# Altium PCB SSDR.PcbDoc
Units mm, origin at the board's own origin, x right, y up, seen from the top; angles counter-clockwise.
Board outline 90.25 x 65.25 mm, 2 copper layers (Top Layer, Bottom Layer); 26 components, 25 nets, 97 pads, 4 vias.
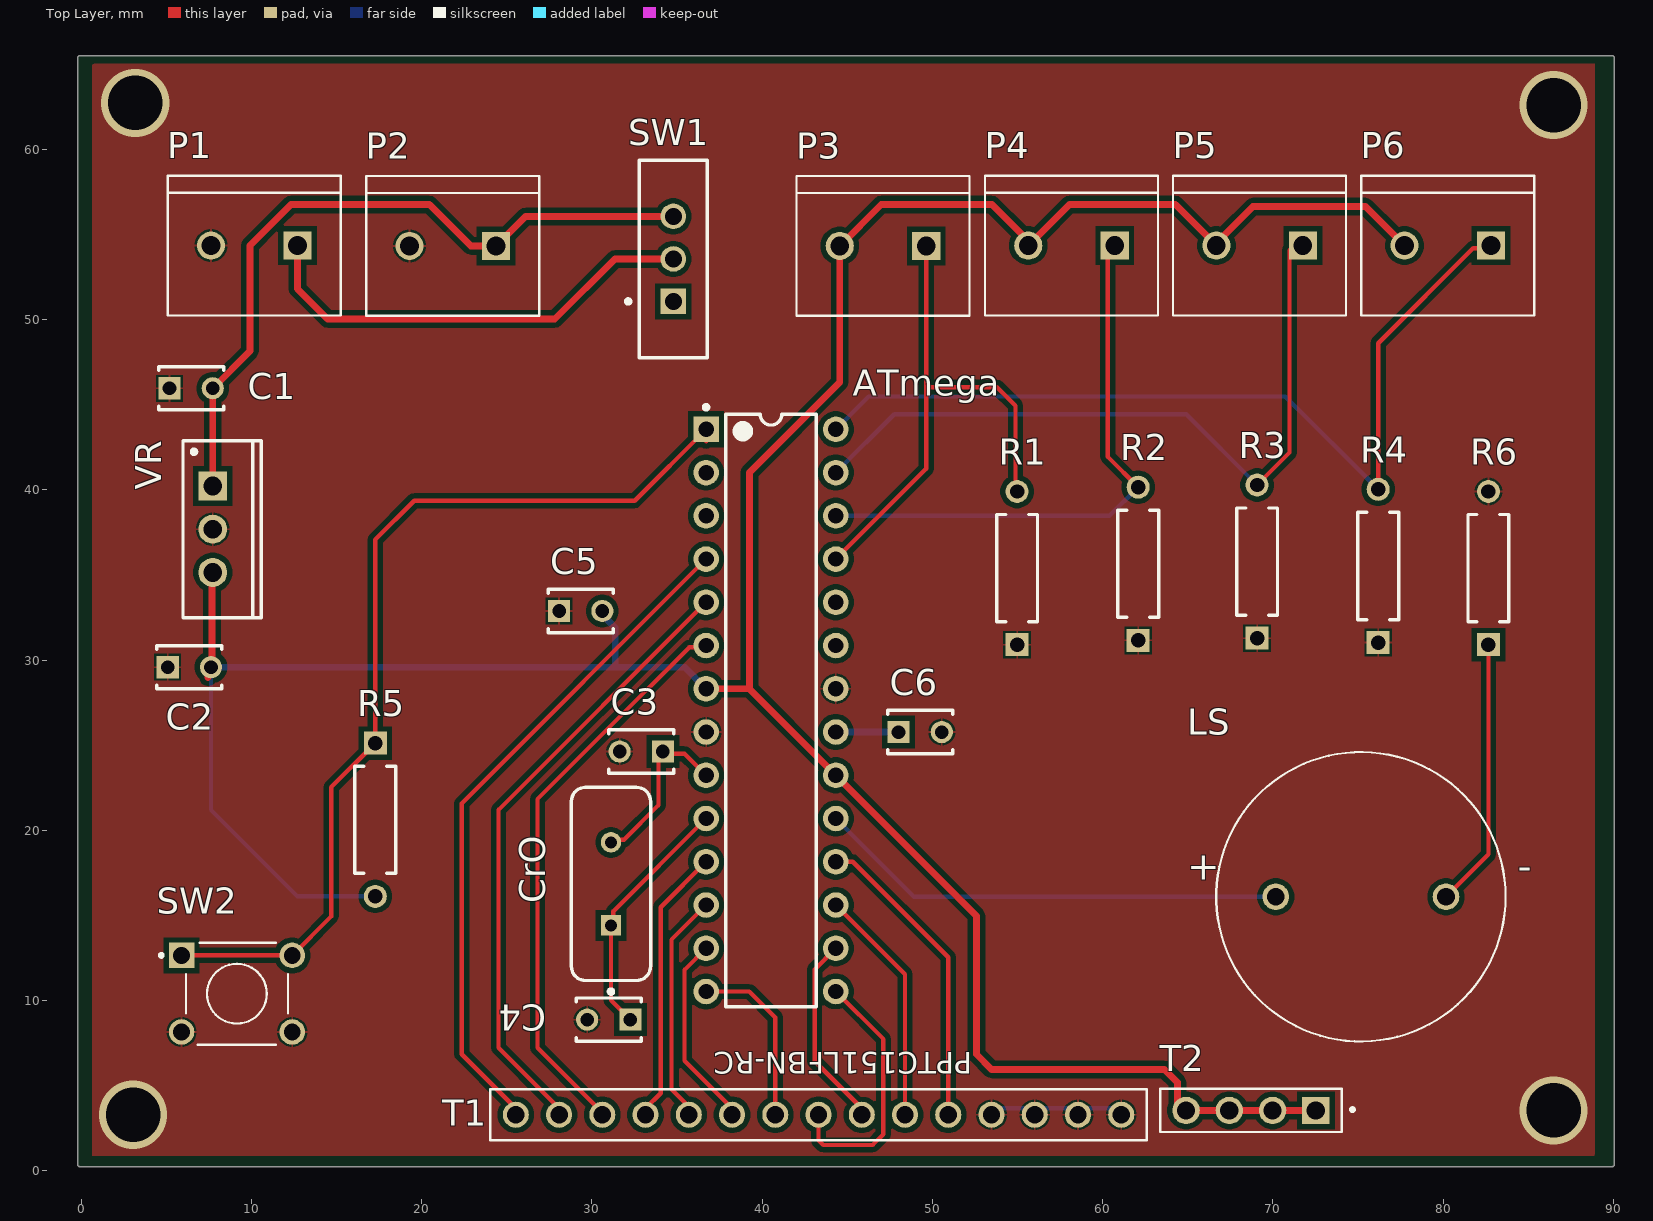
[diagram p0: Top Layer view]
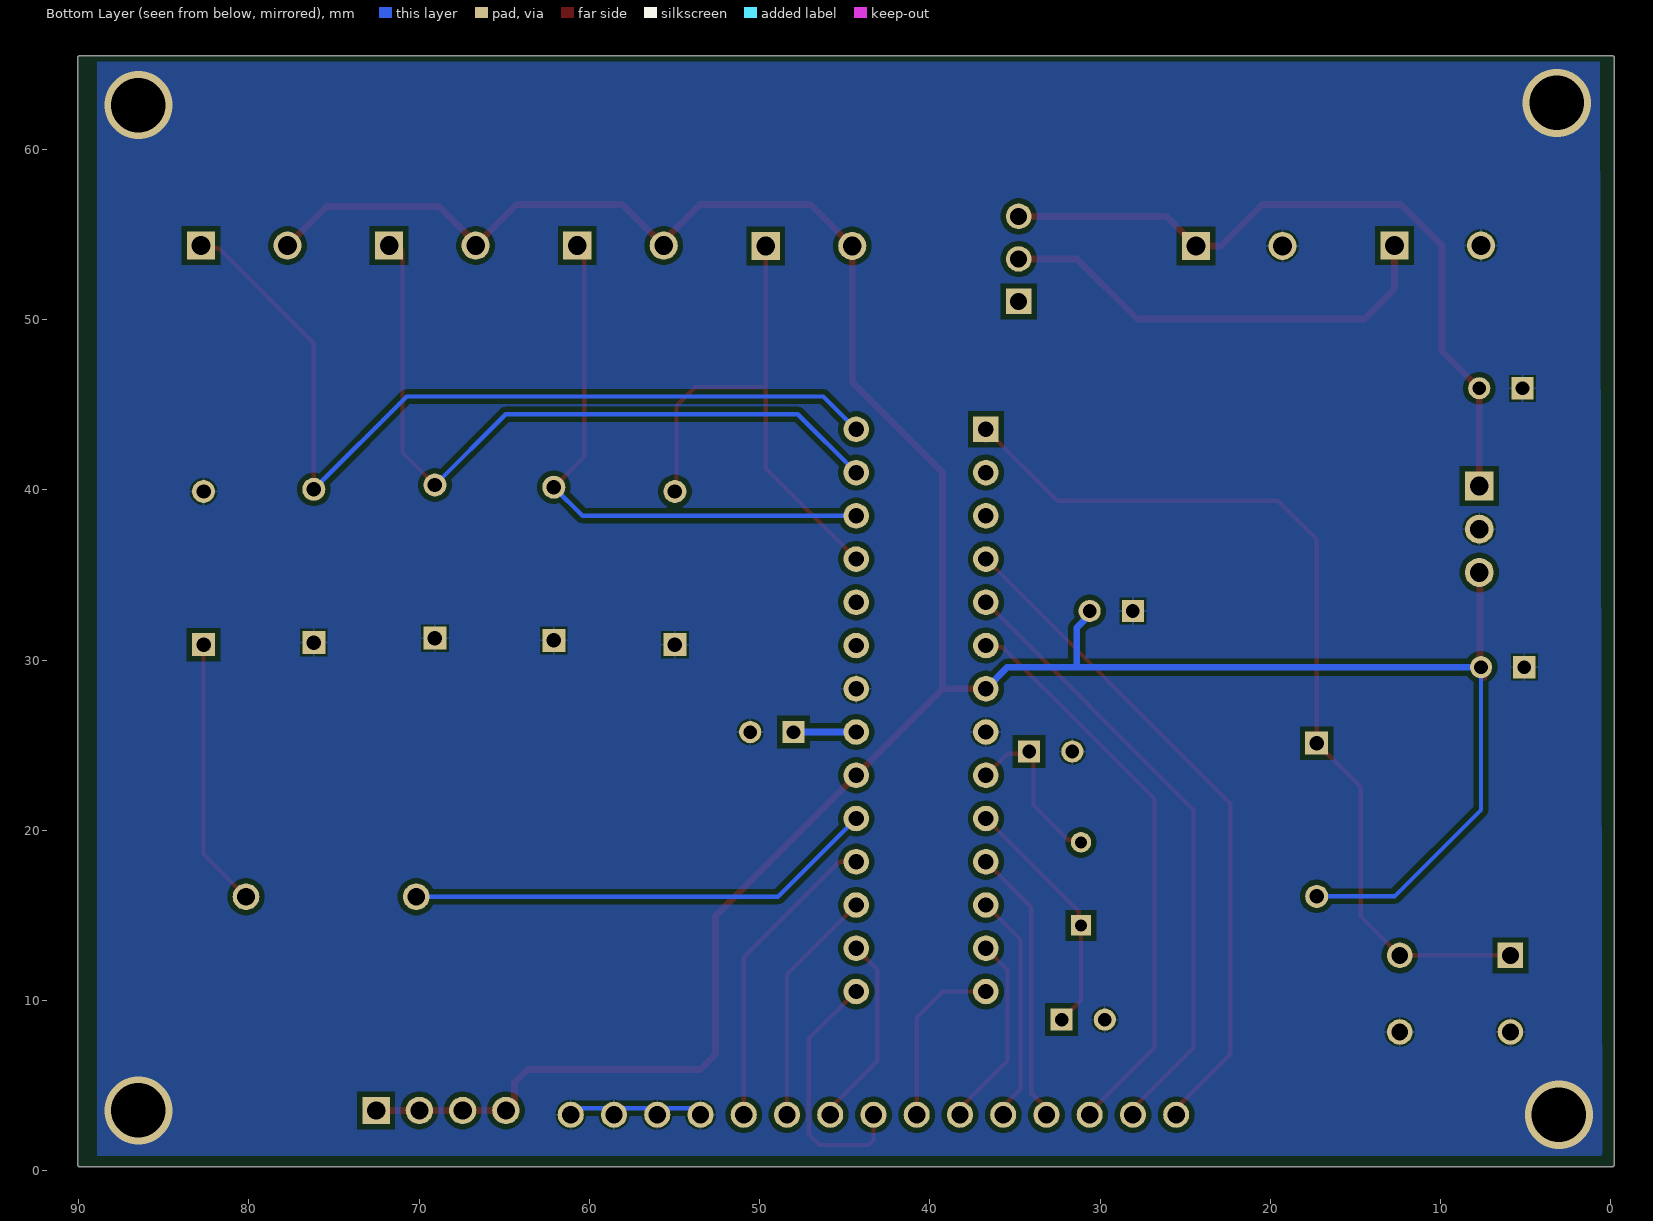
[diagram p1: Bottom Layer view, seen from below]

## Layer stack, top to bottom
Top Solder: solder mask 0.0102, Solder Resist, Dk 3.5
Top Layer: signal copper 0.0356
Dielectric 1: dielectric 0.32, FR-4, Dk 4.8
Bottom Layer: signal copper 0.0356
Bottom Solder: solder mask 0.0102, Solder Resist, Dk 3.5

## Board outline
-0.079,0.254 cw(c-0.08,0.381) -0.207,0.381 -0.207,65.381 cw(c-0.08,65.381) -0.08,65.508 89.92,65.508 cw(c89.92,65.381) 90.047,65.381 90.047,0.381 cw(c89.92,0.381) 89.92,0.254

## Design rules (kind name [scope] priority, off if disabled: settings)
BoardOutlineClearance [All] p1: gap=0.2 ignorepadtopadclearanceinfootprint=FALSE
Clearance [All] p1: gap=0.3 ignorepadtopadclearanceinfootprint=FALSE
ComponentClearance [All] p1: gap=0.127 collisioncheckmode=3 verticalgap=0.127 showdistances=TRUE
DiffPairsRouting [All] p1: maxlimit=0.254 minlimit=0.127 mostfreqgap=0.127 toplayer_minwidth=0.127 toplayer_maxwidth=25.4 toplayer_prefwidth=0.127 bottomlayer_minwidth=0.127 bottomlayer_maxwidth=25.4 bottomlayer_prefwidth=0.127 maxuncoupledlength=12.7
Height [All] p1: minheight=0 maxheight=1816.048 prefheight=12.7
HoleSize [All] p1: absolutevalues=TRUE maxlimit=6.3 minlimit=0.3 maxpercent=80.000 minpercent=20.000
HoleToHoleClearance [All] p1: gap=0.3 allowstackedmicrovias=FALSE
MinimumAnnularRing [All] p1: minimumring=0.076
MinimumSolderMaskSliver [All] p1: minsoldermaskwidth=0
PlaneClearance [All] p1: clearance=0.127
PlaneConnect PlaneConnectPowerPads [InPadClass('PowerPads')] p1: planeconnectstyle=Direct reliefexpansion=0.508 reliefentries=4 reliefconductorwidth=0.254 reliefairgap=0.254
PlaneConnect [All] p2: pad.planeconnectstyle=Relief pad.reliefexpansion=0.3 pad.reliefentries=4 pad.reliefconductorwidth=0.127 pad.reliefairgap=0.127 via.planeconnectstyle=Direct via.reliefexpansion=0.3 via.reliefentries=4 via.reliefconductorwidth=0.127 via.reliefairgap=0.127
PolygonConnect PolygonConnectPowerPads [All vs (InPadClass('PowerPads'))] p1: connectstyle=Direct reliefconductorwidth=0.254 reliefentries=4 polygonreliefangle="90 Angle" airgapwidth=0.254
PolygonConnect [All] p2: thpad.connectstyle=Relief thpad.reliefconductorwidth=0.127 thpad.reliefentries=4 thpad.polygonreliefangle="90 Angle" thpad.airgapwidth=0.127 smdpad.connectstyle=Relief smdpad.reliefconductorwidth=0.127 smdpad.reliefentries=4 smdpad.polygonreliefangle="90 Angle" smdpad.airgapwidth=0.127 via.connectstyle=Direct via.reliefconductorwidth=0.127 via.reliefentries=4 via.polygonreliefangle="90 Angle" via.airgapwidth=0.127
RoutingVias [All] p1: holewidth=0.3 width=0.6 viastyle="Through Hole" minholewidth=0.3 minwidth=0.6 maxholewidth=0.6 maxwidth=6.6
SilkToSilkClearance [All] p1: silktosilkclearance=0
SilkToSolderMaskClearance [IsPad] p1: minsilkscreentomaskgap=0.127 clearancetoexposedcopper=TRUE
SolderMaskExpansion [All] p1: expansion=0.075 istentingtop=FALSE
Width [All] p1: maxlimit=25.4 minlimit=0.127 preferedwidth=0.127 minimp=50.000000 maximp=50.000000 favimp=50.000000
20 further rules are at their usual default settings.

## Components (designator, comment, footprint, x,y, rotation, side; value= is the part's Value field where it differs from the comment)
ATmega "ATMEGA328P-PU" ATML-28P3 40.513,27.051 r0 top
C1 "330nF" KEMT-C315-THT-2 6.455,45.974 r0 top
C2 "100nF" KEMT-C315-THT-2 6.35,29.591 r0 top
C3 "22pF" KEMT-C315-THT-2 32.893,24.638 r180 top
C4 "22pF" KEMT-C315-THT-2 30.988,8.89 r180 top
C5 "10uF" KEMT-C315-THT-2 29.337,32.893 r0 top
C6 "0.1uF" KEMT-C315-THT-2 49.276,25.781 r0 top
CrO "FOXSLF/160-20" FOX-FOXSLF160-20 31.115,16.864 r90 top
LS "PKM17EPP-2002-B0" SPKR_PKM17EPP-2002-B0 75.162,16.107 r0 top
P1 "282837-2" TE_282837-2 10.16,54.356 r180 top
P2 "282837-2" TE_282837-2 21.822,54.334 r180 top
P3 "282837-2" TE_282837-2 47.095,54.334 r180 top
P4 "282837-2" TE_282837-2 58.166,54.356 r180 top
P5 "282837-2" TE_282837-2 69.215,54.356 r180 top
P6 "282837-2" TE_282837-2 80.264,54.356 r180 top
R1 "CFR-25JB-52-470K" RESA60-630X240 54.969,35.411 r90 top value=330
R2 "CFR-25JB-52-470K" RESA60-630X240 62.081,35.665 r90 top value=330
R3 "CFR-25JB-52-470K" RESA60-630X240 69.066,35.792 r90 top value=330
R4 "CFR-25JB-52-470K" RESA60-630X240 76.178,35.538 r90 top value=330
R5 "CFR-25JB-52-470K" RESA60-630X240 17.272,20.629 r270 top value=10k
R6 "CFR-25JB-52-470K" RESA60-630X240 82.655,35.411 r90 top value=100
SW1 "EG1218" ESWI-EG1218_V 34.776,53.572 r90 top
SW2 "1825910-6" SW_1825910-6-4 9.144,10.414 r0 top
T1 "PPTC151LFBN-RC" PPTC151LFBN-RC 61.087,3.302 r180 top
T2 "PPTC041LFBN-RC" SULLINS_PPTC041LFBN-RC 68.707,3.556 r180 top
VR "L7805CV" TO220 7.725,37.697 r270 top

## Footprints (in the part's own frame and the unit in brackets; to place one, negate y for a bottom-side part, rotate by r counter-clockwise, add the part's x,y. Pads: shape width x height; smd on the part's side, far side on the other; paste and mask are expansions set on the pad)
ATML-28P3 [mm] "DIP, 28-Leads, Body 34.8x7.2mm, Pitch 2.54mm"
  rect 1.5x1.5 hole 0.9: 1(-3.81,16.51)
  round 1.5 hole 0.9: 2(-3.81,13.97) 3(-3.81,11.43) 4(-3.81,8.89) 5(-3.81,6.35) 6(-3.81,3.81) 7(-3.81,1.27) 8(-3.81,-1.27) 9(-3.81,-3.81) 10(-3.81,-6.35) 11(-3.81,-8.89) 12(-3.81,-11.43) 13(-3.81,-13.97) 14(-3.81,-16.51) 15(3.81,-16.51) 16(3.81,-13.97) 17(3.81,-11.43) 18(3.81,-8.89) 19(3.81,-6.35) 20(3.81,-3.81) 21(3.81,-1.27) 22(3.81,1.27) 23(3.81,3.81) 24(3.81,6.35) 25(3.81,8.89) 26(3.81,11.43) 27(3.81,13.97) 28(3.81,16.51)
  silkscreen extent -3.93,-17.4 2.65,17.93, body extent -3.95,-17.4 3.95,17.4, height 4.58
ESWI-EG1218_V [mm] "THD, 3-Leads, Body 11.6x4mm, Pitch 2.5mm"
  rect 1.5x1.5 hole 1: 1(-2.5,0)
  round 1.5 hole 1: 2(0,0) 3(2.5,0)
  silkscreen extent -5.8,-2 5.8,2.77, body extent -5.8,-2 5.8,2, height 7.4
FOX-FOXSLF160-20 [mm] "THD, 2-Leads, Body 11.35x4.65mm"
  rect 1.2x1.2 hole 0.7: 1(-2.44,0)
  round 1.2 hole 0.7: 2(2.44,0)
  silkscreen extent -6.45,-2.33 5.68,2.33, body extent -5.67,-2.32 5.68,2.33, height 3.6
KEMT-C315-THT-2 [mm] "THD, 2-Leads, Body 3.81x2.54mm"
  rect 1.3x1.3 hole 0.8: 1(-1.27,0)
  round 1.3 hole 0.8: 2(1.27,0)
  silkscreen extent -1.91,-1.27 1.91,1.27, body extent -1.91,-1.27 1.91,1.27, height 4.66
PPTC151LFBN-RC [mm]
  round 1.53 hole 1.02: P$1(0,0) P$2(2.54,0) P$3(5.08,0) P$4(7.62,0) P$5(10.16,0) P$6(12.7,0) P$7(15.24,0) P$8(17.78,0) P$9(20.32,0) P$10(22.86,0) P$11(25.4,0) P$12(27.94,0) P$13(30.48,0) P$14(33.02,0) P$15(35.56,0)
  silkscreen extent -1.5,-1.5 37.06,1.5
RESA60-630X240 [mm] "Axial Resistor, 2-Leads, Dia 2.4mm, Body Length 6.3mm"
  rect 1.35x1.35 hole 0.85: 1(-4.5,0)
  round 1.35 hole 0.85: 2(4.5,0)
  silkscreen extent -3.15,-1.2 3.15,1.2, body extent -4.77,-1.19 4.77,1.2, height 2.4
SPKR_PKM17EPP-2002-B0 [mm]
  round 1.56 hole 1.04: N(5,0) P(-5,0)
  silkscreen extent -8.5,-8.5 8.5,8.5
SULLINS_PPTC041LFBN-RC [mm]
  rect 1.605x1.605 / inner round 1.605 / far side rect 1.605x1.605 hole 1.07: 1(-3.81,0)
  round 1.605 hole 1.07: 2(-1.27,0) 3(1.27,0) 4(3.81,0)
  silkscreen extent -6.06,-1.27 5.33,1.27, body extent -5.33,-1.27 5.33,1.27, height 8.51
SW_1825910-6-4 [mm]
  rect 1.498x1.498 / inner round 1.498 / far side rect 1.498x1.498 hole 0.99: 1(-3.25,2.25)
  round 1.498 hole 0.99: 2(3.25,2.25) 3(-3.25,-2.25) 4(3.25,-2.25)
  silkscreen extent -4.54,-2.99 3,2.99, body extent -3,-3.9 3,3.9, height 5.01
TE_282837-2 [mm]
  rect 1.65x1.65 / inner round 1.65 / far side rect 1.65x1.65 hole 1.1: 1(-2.54,0)
  round 1.65 hole 1.1: 2(2.54,0)
  silkscreen extent -5.08,-4.1 5.08,4.1, body extent -5.68,-4.1 5.08,4.1, height 10
TO220 [mm] "TO, Thru-Hole, Vertical, Heatsink Mounted; 3 In-Line Leads; Pitch 2.54 mm"
  rect 1.7x1.7 hole 1.1: 1(-2.54,0)
  round 1.7 hole 1.1: 2(0,0) 3(2.54,0)
  silkscreen extent -5.2,-1.75 5.2,2.85, body extent -5.25,-1.8 5.25,2.9, height 19.7

## Part data
ATmega: library part CMP-020-00004-3, "8-Bit Microcontroller with 32 KBytes In-System Programmable Flash, 23 I/Os, -40 to 85 degC, 28-Pin PDIP (28P3), RoHS, Tube", Case/Package=DIP, Manufacturer=Atmel, Max Clock Frequency=20MHz, Max Operating Temperature=85°C, Max Supply Voltage=5.5V, Min Operating Temperature=-40°C, Min Supply Voltage=1.8V, Package Description="28-Pin Plastic Dual Inline Package, Body 34.671 x 7.3025 mm, Pitch 2.54 mm", Package Quantity=14, Package Reference=28P3, Package Version="Rev. B, 09/2001", Datasheet URL=http://www.atmel.com/images/Atmel-8271-8-bit-AVR-Microcontroller-ATmega48A-48PA-88A-88PA-168A-168PA-328-328P_datasheet_Complete.pdf, Datasheet Version="Rev. 8271J, 11/2015", Density=32KB, Ethernet Channels=0, I/Os=23, Interface=USART, Manufacturer URL=http://www.atmel.com/, Mounting Technology=TH, Package URL=http://www.atmel.com/images/Atmel-8271-8-bit-AVR-Microcontroller-ATmega48A-48PA-88A-88PA-168A-168PA-328-328P_datasheet_Complete.pdf, Packaging=Rail/Tube, Pins=28, RAM Size=2KB, RoHS Compliant=True
C1 C2 C3 C4 C5 C6: library part CMP-1664-00008-1, "Capacitor, Ceramic, 22 pF, +/-10 %, 100 V, -55 to 125 degC, 2-Pin THD, RoHS, Bulk", Case\Package=TO-220, Max Input Voltage="40 V", Max Operating Temperature="125 degC", Max Ouput Current="1.5 A", Min Input Voltage="4.2 V", Min Operating Temperature="0 degC", Output Voltage="1.2 V", Package Quantity=50, ComponentLink1Description="Manufacturer URL", ComponentLink1URL=http://www.kemet.com/, ComponentLink2Description=Datasheet, ComponentLink2URL=http://capacitoredge.kemet.com/capedge2/DataSheet/Datasheet-C315C220K1G5TA.pdf?pn=C315C220K1G5TA{BULK}, DatasheetVersion=Aug-16, Height="9.28 mm", Length="10.28 mm", Mount="Through Hole", Output Current="1.5 A", Outputs=1, PackageDescription="2-Pin Through Hole Device, Body 3.81 x 2.54 mm", PackageReference=C315-THT-2, Packaging=Rail/Tube, Pins=3, Radiation Hardening=No, REACH SVHC="No SVHC", RoHSCompliant=true, Weight="0.08113 oz", Width="4.82 mm"
CrO: library part CMP-1749-00003-1, "Resistance Weld Thru-Hole Crystal, 16 MHz, -20 to 70 degC, 2-Pin THD, RoHS, Bulk", Case\Package=Axial, Max Operating Temperature="155 degC", Min Operating Temperature="-55 degC", Package Quantity=200, Power Rating="250 mW", Resistance="221 kohm", Tolerance=1%, Voltage Rating="250 V", ComponentLink1Description="Manufacturer URL", ComponentLink1URL=http://www.foxonline.com/, ComponentLink2Description=Datasheet, ComponentLink2URL=http://www.foxonline.com/pdfs/hc49slf.pdf, DatasheetVersion=Mar-15, Length="0.248 inch", Mount="Through Hole", PackageDescription="2-Pin Through Hole Device, Body 11.35 x 4.65 mm", PackageReference=FOXSLF160-20, Packaging=Bulk, RoHSCompliant=true
LS: library part CMP-017-000001-1, "Buzzers Transducer, Externally Driven Piezo 3V 2kHz 70dB @ 3V, 10cm Through Hole PC Pins", Package=None, Availability=Unavailable, Component Type=Standard, Design Item ID=PKM17EPP-2002-B0, MP=PKM17EPP-2002-B0, Pin Count=2, Price=None, Source=PKM17EPP-2002-B0.SchLib
P1 P2 P3 P4 P5 P6: library part CMP-019-000000-1, "Разъемные клеммные колодки Розетка 2 положения 5,08 мм Припой прямой через отверстие 13,5 А / контакт", Package=None, Availability="In Stock", Check_prices=https://www.snapeda.com/parts/282837-2/TE+Connectivity+AMP+Connectors/view-part/?ref=eda, Component Type=Standard, Design Item ID=282837-2, MF="TE Connectivity", MP=282837-2, Pin Count=2, Price=None, Purchase-URL=https://pricing.snapeda.com/search/part/282837-2/?ref=eda, SnapEDA_Link=https://www.snapeda.com/parts/282837-2/TE+Connectivity+AMP+Connectors/view-part/?ref=snap, Source=282837-2.SchLib
R1 R2 R3 R4 R5 R6: library part CMP-009-00055-4, "RES 470K OHM 5% 1/4W AXIAL", Case/Package=Axial, Manufacturer=Yageo, Max Operating Temperature=155°C, Min Operating Temperature=-55°C, Package Description="2-Pin Axial Lead, Dia 2.4 mm, Body Length 6.3 mm", Package Quantity=200, Package Reference=MFR-25, Power=250mW, Tolerance=1%, Voltage Rating=250V, Datasheet URL=http://www.yageo.com/documents/recent/Yageo%20LR_MFR_2013.pdf, Datasheet Version=Apr-13, Manufacturer URL=http://www.yageo.com/, Mounting Technology=TH, Packaging=Bulk, RoHS Compliant=True
SW1: library part CMP-011-00006-2, "Slide Switch, SPDT, 500 V, -20 to 70 degC, 3-Pin THD, RoHS, Bulk", Contact Current Rating=200mA, Manufacturer=E-Switch, Max Operating Temperature=70°C, Min Operating Temperature=-20°C, Operating Force=250gf, Package Description="3-Pin Through Hole Device, Body 11.6 x 4 mm, Pitch 2.5 mm", Package Quantity=1000, Voltage Rating (AC)=30V, Case/Package=EG1218, Contact Finish=Silver, Contact Material=Copper, Contact Plating=Silver, Current Rating=200mA, Datasheet URL=https://www.e-switch.com/system/asset/product_line/data_sheet/119/EG.pdf, Datasheet Version=Oct-15, Manufacturer URL=http://www.e-switch.ch/en/, Mounting Technology=TH, Package Reference=EG1218, Packaging=Bulk, Pins=3, RoHS Compliant=True, Throw Configuration=SPDT, Voltage Rating (DC)=30V
SW2: library part CMP-011-00014-1, "Switch Push Button OFF (ON) SPST Round Button 0.05A 24VDC Momentary Contact PC Pins Thru-Hole", Case/Package=None, Check_prices=https://www.snapeda.com/parts/1825910-6/TE+Connectivity+ALCOSWITCH+Switches/view-part/?ref=eda, Component Type=Standard, Design Item ID=1825910-6, Digi-Key_Part_Number=450-1650-ND, MF="TE Connectivity", MP=1825910-6, Pins=4, Purchase-URL=https://pricing.snapeda.com/search/part/1825910-6/?ref=eda, SnapEDA_Link=https://www.snapeda.com/parts/1825910-6/TE+Connectivity+ALCOSWITCH+Switches/view-part/?ref=snap, Source=1825910-6.SchLib
T1: library part CMP-002-00072-1, "15 Position Header Connector Through Hole", Case/Package=None, Availability=Unavailable, Component Type=Standard, Design Item ID=PPTC151LFBN-RC, MF="Sullins Connector", MP=PPTC151LFBN-RC, Pins=15, Price=None, SnapEDA_Link=https://www.snapeda.com/parts/PPTC151LFBN-RC/Sullins%20Connector%20Solutions/view-part/592000/?ref=snap, Source=SnapEDAsch.SchLib
T2: library part CMP-002-00073-1, "4 Position Header Connector 0.100 (2.54mm) Through Hole Tin", Case/Package=None, Check_prices=https://www.snapeda.com/parts/PPTC041LFBN-RC/Sullins+Connector+Solutions/view-part/?ref=eda, Component Type=Standard, Design Item ID=PPTC041LFBN-RC, Digi-Key_Part_Number=S7002-ND, MF="Sullins Connector", MP=PPTC041LFBN-RC, Pins=4, Purchase-URL=https://pricing.snapeda.com/search/part/PPTC041LFBN-RC/?ref=eda, SnapEDA_Link=https://www.snapeda.com/parts/PPTC041LFBN-RC/Sullins+Connector+Solutions/view-part/?ref=snap, Source=PPTC041LFBN-RC.SchLib
VR: library part CMP-019-00018-3, Case/Package=TO-220, Dropout Voltage=2V, Manufacturer=STMicroelectronics, Max Input Voltage=35V, Max Operating Temperature=125°C, Max Ouput Current=1.5A, Max Supply Voltage=20V, Min Input Voltage=7V, Min Operating Temperature=0°C, Min Supply Voltage=8V, Nominal Output Voltage=5V, Package Quantity=50, Datasheet URL=https://datasheet.ciiva.com/15111/getdatasheetpartid-44136-15111027.pdf, Datasheet Version="Rev 30, 09/2012", Manufacturer URL=http://www.st.com/, Mounting Technology=TH, Output Current=1.5A, Output Voltage=5V, Outputs=1, Packaging=Rail/Tube, Pins=3, RoHS Compliant=True

## Via types
v1: diameter 4, hole 3.2, Top Layer to Bottom Layer, 4 vias

## Nets (pads, with @x,y where several pads share a name; then routed paths per layer and width w, separated by ;. In a path a pad name is that pad's centre, name@x,y a point inside that pad or via, vN(x,y) a via of type N, cw(c..) or ccw(c..) an arc to the next point about the centre after c; other vN are vias at no path point)
GND: ATmega.8 ATmega.22 C1.1 C2.1 C3.2 C4.2 C5.1 C6.2 P1.2 P2.2 R1.1 R2.1 R3.1 R4.1 R6.2 SW2.3 SW2.4 T1.P$1 T1.P$2 T1.P$3 T1.P$4 VR.2 | length 10.2
  Bottom Layer w0.254: T1.P$3@56.007,3.683 53.467,3.683 58.547,3.683 T1.P$1@61.087,3.683
  other v1: 3.048,3.302 86.487,3.556 86.487,62.611 3.175,62.738
NetATmega_1: ATmega.1 R5.1 SW2.1 SW2.2 | length 55.8
  Top Layer w0.254: SW2.1 SW2.2 14.678,14.948 14.678,22.535 R5.1 17.272,37.084 19.558,39.37 32.512,39.37 ATmega.1 ATmega.1@36.703,42.854
NetATmega_4: ATmega.4 T1.P$15 | length 39.5
  Top Layer w0.254: T1.P$15@25.527,3.683 22.352,6.858 22.352,21.59 ATmega.4
NetATmega_5: ATmega.5 T1.P$14 | length 36.2
  Top Layer w0.254: T1.P$14@28.067,3.683 24.511,7.239 24.511,21.209 ATmega.5
NetATmega_6: ATmega.6 T1.P$13 | length 33.5
  Top Layer w0.254: T1.P$13@30.607,3.683 30.353,3.683 26.797,7.239 26.797,21.844 30.945,25.992 35.721,30.768 36.61,30.768 ATmega.6
NetATmega_9: ATmega.9 C3.1 CrO.2 | length 10
  Top Layer w0.254: CrO.2 31.264,19.453 31.877,19.453 31.877,19.458 33.909,21.49 33.909,24.511 35.433,24.511 ATmega.9
NetATmega_10: ATmega.10 C4.1 CrO.1 | length 14.6
  Top Layer w0.254: C4.1 31.115,10.033 CrO.1 31.258,14.567 31.258,15.256 ATmega.10
NetATmega_11: ATmega.11 T1.P$12 | length 16
  Top Layer w0.254: T1.P$12@33.147,3.683 34.036,4.572 34.036,15.494 ATmega.11
NetATmega_12: ATmega.12 T1.P$11 | length 13.2
  Top Layer w0.254: T1.P$11@35.687,3.683 35.687,3.78 34.671,4.796 34.671,13.589 ATmega.12
NetATmega_13: ATmega.13 T1.P$10 | length 11.1
  Top Layer w0.254: ATmega.13 35.433,11.811 35.433,6.477 T1.P$10@38.227,3.683
NetATmega_14: ATmega.14 T1.P$9 | length 10
  Top Layer w0.254: ATmega.14 39.243,10.541 40.767,9.017 T1.P$9@40.767,3.683
NetATmega_15: ATmega.15 T1.P$8 | length 15.2
  Top Layer w0.254: T1.P$8 43.307,1.8 43.583,1.524 46.482,1.524 47.117,2.159 47.117,7.747 ATmega.15
NetATmega_16: ATmega.16 T1.P$7 | length 11.1
  Top Layer w0.254: ATmega.16 43.082,11.84 43.082,6.448 T1.P$7@45.847,3.683
NetATmega_17: ATmega.17 T1.P$6 | length 13.6
  Top Layer w0.254: ATmega.17 48.387,11.557 T1.P$6@48.387,3.683
NetATmega_18: ATmega.18 T1.P$5 | length 17.8
  Top Layer w0.254: ATmega.18 45.316,18.161 50.927,12.55 T1.P$5@50.927,3.683
NetATmega_19: ATmega.19 LS.P | length 27.7
  Bottom Layer w0.254: ATmega.19 48.917,16.107 LS.P
NetATmega_21: ATmega.21 C6.1 | length 3.7
  Bottom Layer w0.4: ATmega.21 C6.1
NetATmega_25: ATmega.25 P3.1 R1.2 | length 31.4
  Top Layer w0.254: ATmega.25 49.635,41.253 49.635,46.04 ; P3.1 49.635,46.04 ; R1.2 54.874,40.007 54.874,44.948 53.782,46.04 49.635,46.04
NetATmega_26: ATmega.26 P4.1 R2.2 | length 33.2
  Top Layer w0.254: P4.1@60.303,54.207 60.303,41.943 R2.2
  Bottom Layer w0.254: ATmega.26 60.397,38.481 R2.2
NetATmega_27: ATmega.27 P5.1 R3.2 | length 42.5
  Top Layer w0.254: R3.2 70.971,42.197 P5.1@70.971,54.08
  Bottom Layer w0.254: ATmega.27 47.756,44.454 64.905,44.454 R3.2
NetATmega_28: ATmega.28 P6.1 R4.2 | length 52.5
  Top Layer w0.254: R4.2 76.178,48.619 81.766,54.207 82.655,54.207 P6.1
  Bottom Layer w0.254: ATmega.28 46.257,45.495 70.721,45.495 R4.2
NetC1_2: C1.2 P2.1 SW1.3 VR.1 | length 42.6
  Top Layer w0.4: VR.1 C1.2 9.906,48.155 9.906,54.356 12.319,56.769 20.447,56.769 22.882,54.334 P2.1 26.1,56.072 SW1.3
NetLS_N: LS.N R6.1 | length 15.8
  Top Layer w0.254: LS.N 82.655,18.6 R6.1
NetP1_1: P1.1 SW1.2 | length 26.8
  Top Layer w0.4: P1.1 12.7,51.816 14.478,50.038 27.813,50.038 31.347,53.572 SW1.2
VCC: ATmega.7 ATmega.20 C2.2 C5.2 P3.2 P4.2 P5.2 P6.2 R5.2 T2.1 T2.2 T2.3 T2.4 VR.3 | length 178.6
  Top Layer w0.254: ATmega.20 ATmega.20@44.513,23.051
  Top Layer w0.4: C2.2@7.448,28.988 7.448,29.419 C2.2 7.673,29.644 7.673,35.105 VR.3 ; ATmega.7 39.243,28.321 ; ATmega.20 39.243,28.321 ; ATmega.20@44.513,23.051 52.578,14.986 52.578,6.858 53.467,5.969 63.627,5.969 64.389,5.207 64.389,3.556 T2.1@72.009,3.556 ; P6.2 75.438,56.642 68.814,56.642 66.675,54.503 P5.2 64.262,56.769 58.039,56.769 P4.2 55.626,54.63 53.487,56.769 46.99,56.769 P3.2 44.555,46.333 39.243,41.021 39.243,28.321
  Bottom Layer w0.254: C2.2 7.62,21.209 12.7,16.129 R5.2
  Bottom Layer w0.4: C2.2 31.369,29.591 ; R5.2 R5.2@17.399,16.002 ; C5.2 30.607,32.649 31.369,31.887 31.369,29.591 ; ATmega.7 35.433,29.591 31.369,29.591
pads on no net: ATmega.2 ATmega.3 ATmega.23 ATmega.24 SW1.1

## Polygon pours and split planes (outlines as drawn)
GND on Top Layer "GND_L01_P002" (solid, pour order 2): 0.635,65.151 0.762,65.024 88.9,65.024 88.9,1.016 89.027,0.889 0.635,0.889
GND on Bottom Layer "GND_L02_P001" (solid, pour order 1): 0.635,65.151 88.9,65.151 88.9,0.889 0.508,0.889

## Silkscreen, mask and mechanical layers (free items; w line width, h text height)
Mechanical 13:
  lines w0.254: 0,0.127 0,65.278 0.254,65.532 90.043,65.532 90.043,26.797 90.043,0.127 0,0.127

## Text inside footprints (layer, text, board x,y; h text height)
LS: Top Overlay "+" at 64.962,17.107 h1.68; Top Overlay "-" at 84.362,17.107 h1.68; Mechanical 13 "+" at 64.962,17.107 h1.68; Mechanical 13 "-" at 84.362,17.107 h1.68